# Altium PCB 板框.PcbDoc
Units mil, origin at the board's own origin, x right, y up, seen from the top; angles counter-clockwise.
Board outline 7795.81 x 3150.14 mil, 2 copper layers (Top Layer, Bottom Layer); 1 components, 0 nets, 2 pads, 0 vias.
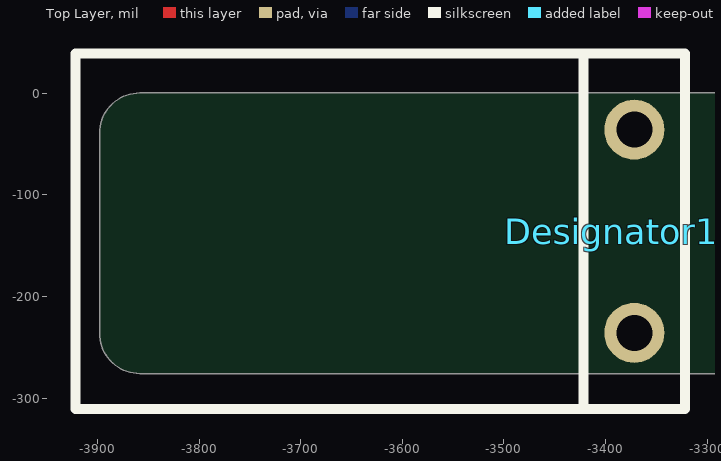
[diagram p0: Top Layer view]
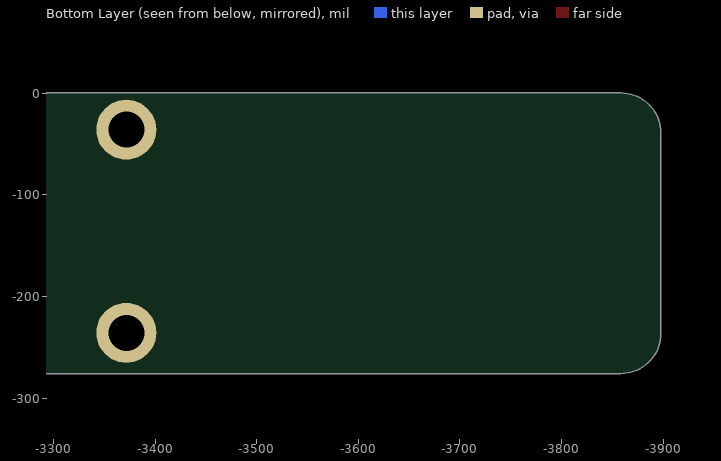
[diagram p1: Bottom Layer view, seen from below]

## Layer stack, top to bottom
Top Solder: solder mask 0.4, Solder Resist, Dk 3.5
Top Layer: signal copper 1.4
Dielectric 1: dielectric 12.6, FR-4, Dk 4.8
Bottom Layer: signal copper 1.4
Bottom Solder: solder mask 0.4, Solder Resist, Dk 3.5

## Board outline
-1716.8,-3086.88 -1834.65,-3086.88 cw(c-1834.65,-3086.61) -1834.91,-3086.61 -1834.91,-3007.87 cw(c-1795.28,-3007.87) -1795.28,-2968.24 -1629.92,-2968.24 cw(c-1629.92,-2968.5) -1629.91,-2968.24 ccw(c-1629.92,-2929.13) -1590.82,-2929.13 -1590.82,-314.96 ccw(c-1629.92,-314.96) -1629.91,-275.86 ccw(c-1629.92,-314.96) -1629.92,-275.86 -3858.27,-275.86 cw(c-3858.27,-236.22) -3897.9,-236.22 cw(c-3897.64,-236.22) -3897.9,-236.21 -3897.9,-39.37 cw(c-3858.27,-39.37) -3858.27,0.26 3858.27,0.26 cw(c3858.27,-39.37) 3897.9,-39.37 cw(c3897.64,-39.37) 3897.9,-39.38 3897.9,-236.22 ccw(c3897.64,-236.22) 3897.9,-236.21 3897.9,-236.22 cw(c3858.27,-236.22) 3858.27,-275.86 1629.92,-275.86 cw(c1629.92,-275.59) 1629.91,-275.86 cw(c1629.92,-314.96) 1629.92,-275.86 1629.91,-275.86 ccw(c1629.92,-314.96) 1590.82,-314.96 1590.82,-2929.13 ccw(c1629.92,-2929.13) 1629.91,-2968.24 cw(c1629.92,-2968.5) 1629.92,-2968.24 1795.28,-2968.24 cw(c1795.28,-3007.87) 1834.91,-3007.87 1834.91,-3086.61 cw(c1834.65,-3086.61) 1834.65,-3086.88 1716.8,-3086.88 1716.8,-3149.61 cw(c1716.54,-3149.61) 1716.54,-3149.87 1354.33,-3149.87 cw(c1354.33,-3149.61) 1354.07,-3149.61 1354.07,-314.96 ccw(c1314.96,-314.96) 1314.97,-275.86 cw(c1314.96,-275.59) 1314.96,-275.86 -1314.96,-275.86 cw(c-1314.96,-275.59) -1314.97,-275.86 cw(c-1314.96,-314.96) -1314.96,-275.86 -1314.97,-275.86 ccw(c-1314.96,-314.96) -1354.07,-314.96 -1354.07,-3149.61 cw(c-1354.33,-3149.61) -1354.33,-3149.87 -1716.54,-3149.87 cw(c-1716.54,-3149.61) -1716.8,-3149.61

## Design rules (kind name [scope] priority, off if disabled: settings)
Clearance [All] p1: gap=10 ignorepadtopadclearanceinfootprint=FALSE except(0: Arc-Hole Track-Hole SMDPad-Hole THPad-Hole Via-Hole Fill-Hole Poly-Hole Region-Hole Text-Hole)
PolygonConnect [All] p1: connectstyle=Relief reliefconductorwidth=10 reliefentries=4 polygonreliefangle="90 Angle" airgapwidth=10
RoutingVias [All] p1: holewidth=28 width=50 viastyle="Through Hole" minholewidth=28 minwidth=50 maxholewidth=28 maxwidth=50
SolderMaskExpansion [All] p1: expansion=4 istentingtop=FALSE
Width [All] p1: maxlimit=10 minlimit=10 preferedwidth=10
30 further rules are at their usual default settings.

## Components (designator, comment, footprint, x,y, rotation, side; value= is the part's Value field where it differs from the comment)
Designator165 "Comment" LD8x10 -3371.61,-135.86 r90 top

## Footprints (in the part's own frame and the unit in brackets; to place one, negate y for a bottom-side part, rotate by r counter-clockwise, add the part's x,y. Pads: shape width x height; smd on the part's side, far side on the other; paste and mask are expansions set on the pad)
LD8x10 [mm] "直插8x10mm电感"
  round 1.5 hole 0.9: 1(-2.54,0) 2(2.54,0)
  silkscreen extent -4.45,-1.27 4.44,13.97, body extent -4,-0.4 4,13.25, height 8

## Nets (pads, with @x,y where several pads share a name; then routed paths per layer and width w, separated by ;. In a path a pad name is that pad's centre, name@x,y a point inside that pad or via, vN(x,y) a via of type N, cw(c..) or ccw(c..) an arc to the next point about the centre after c; other vN are vias at no path point)
pads on no net: Designator165.1 Designator165.2

## Silkscreen, mask and mechanical layers (free items; w line width, h text height)
Mechanical 1:
  lines w0.5: -3897.64,-236.22 ccw(c-3858.27,-236.22) -3858.27,-275.59 ; -3897.64,-236.22 ccw(c-3858.27,-236.22) -3858.27,-275.59 ; -3897.64,-236.22 -3897.64,-39.37 ; -3897.64,-236.22 -3897.64,-39.37 ; -3897.64,-39.37 cw(c-3858.27,-39.37) -3858.27,0 ; -3897.64,-39.37 cw(c-3858.27,-39.37) -3858.27,0 ; -3858.27,-275.59 -1629.92,-275.59 ; -3858.27,-275.59 -1629.92,-275.59 ; -3858.27,0 3858.27,0 ; -3858.27,0 3858.27,0 ; -3818.9,-196.85 -3503.94,-196.85 ; -3818.9,-196.85 -3818.9,-78.74 ; -3818.9,-196.85 -3503.94,-196.85 ; -3818.9,-196.85 -3818.9,-78.74 ; -3818.9,-78.74 -3503.94,-78.74 ; -3818.9,-78.74 -3503.94,-78.74 ; -3503.94,-196.85 -3503.94,-78.74 ; -3503.94,-196.85 -3503.94,-78.74 ; -3503.94,-78.74 -3503.94,-137.8 -3503.94,-78.74 ; -1988.19,-196.85 -1673.23,-196.85 ; -1988.19,-196.85 -1988.19,-78.74 ; -1988.19,-196.85 -1673.23,-196.85 ; -1988.19,-196.85 -1988.19,-78.74 ; -1988.19,-78.74 -1673.23,-78.74 ; -1988.19,-78.74 -1673.23,-78.74 ; -1834.65,-3086.61 -1834.65,-3007.87 ; -1834.65,-3086.61 -1716.54,-3086.61 ; -1834.65,-3086.61 -1834.65,-3007.87 ; -1834.65,-3086.61 -1716.54,-3086.61 ; -1834.65,-3007.87 cw(c-1795.28,-3007.87) -1795.28,-2968.5 ; -1834.65,-3007.87 cw(c-1795.28,-3007.87) -1795.28,-2968.5 ; -1795.28,-2968.5 -1629.92,-2968.5 ; -1795.28,-2968.5 -1629.92,-2968.5 ; -1716.54,-3149.61 -1716.54,-3086.61 ; -1716.54,-3149.61 -1354.33,-3149.61 ; -1716.54,-3149.61 -1716.54,-3086.61 ; -1716.54,-3149.61 -1354.33,-3149.61 ; -1673.23,-196.85 -1673.23,-137.8 ; -1673.23,-196.85 -1673.23,-137.8 ; -1673.23,-137.8 -1673.23,-78.74 ; -1673.23,-137.8 -1673.23,-78.74 ; -1629.92,-2968.5 ccw(c-1629.92,-2929.13) -1590.55,-2929.13 ; -1629.92,-2968.5 ccw(c-1629.92,-2929.13) -1590.55,-2929.13 ; -1629.92,-275.59 cw(c-1629.92,-314.96) -1590.55,-314.96 ; -1629.92,-275.59 cw(c-1629.92,-314.96) -1590.55,-314.96 ; -1590.55,-2929.13 -1590.55,-314.96 ; -1590.55,-2929.13 -1590.55,-314.96 ; -1354.33,-3149.61 -1354.33,-314.96 ; -1354.33,-3149.61 -1354.33,-314.96 ; -1354.33,-314.96 cw(c-1314.96,-314.96) -1314.96,-275.59 ; -1354.33,-314.96 cw(c-1314.96,-314.96) -1314.96,-275.59 ; -1314.96,-275.59 1314.96,-275.59 ; -1314.96,-275.59 1314.96,-275.59 ; -157.48,-196.85 157.48,-196.85 ; -157.48,-196.85 -157.48,-78.74 ; -157.48,-196.85 157.48,-196.85 ; -157.48,-196.85 -157.48,-78.74 ; -157.48,-78.74 157.48,-78.74 ; -157.48,-78.74 157.48,-78.74 ; 157.48,-196.85 157.48,-78.74 ; 157.48,-196.85 157.48,-78.74 ; 157.48,-78.74 157.48,-137.8 157.48,-78.74 ; 1314.96,-275.59 cw(c1314.96,-314.96) 1354.33,-314.96 ; 1314.96,-275.59 cw(c1314.96,-314.96) 1354.33,-314.96 ; 1354.33,-3149.61 1716.54,-3149.61 ; 1354.33,-3149.61 1354.33,-314.96 ; 1354.33,-3149.61 1716.54,-3149.61 ; 1354.33,-3149.61 1354.33,-314.96 ; 1590.55,-2929.13 ccw(c1629.92,-2929.13) 1629.92,-2968.5 ; 1590.55,-2929.13 ccw(c1629.92,-2929.13) 1629.92,-2968.5 ; 1590.55,-2929.13 1590.55,-314.96 ; 1590.55,-2929.13 1590.55,-314.96 ; 1590.55,-314.96 cw(c1629.92,-314.96) 1629.92,-275.59 ; 1590.55,-314.96 cw(c1629.92,-314.96) 1629.92,-275.59 ; 1629.92,-2968.5 1795.28,-2968.5 ; 1629.92,-2968.5 1795.28,-2968.5 ; 1629.92,-275.59 3858.27,-275.59 ; 1629.92,-275.59 3858.27,-275.59 ; 1673.23,-196.85 1988.19,-196.85 ; 1673.23,-196.85 1673.23,-78.74 ; 1673.23,-196.85 1988.19,-196.85 ; 1673.23,-196.85 1673.23,-78.74 ; 1673.23,-78.74 1988.19,-78.74 ; 1673.23,-78.74 1988.19,-78.74 ; 1716.54,-3149.61 1716.54,-3086.61 ; 1716.54,-3149.61 1716.54,-3086.61 ; 1716.54,-3086.61 1834.65,-3086.61 ; 1716.54,-3086.61 1834.65,-3086.61 ; 1795.28,-2968.5 cw(c1795.28,-3007.87) 1834.65,-3007.87 ; 1795.28,-2968.5 cw(c1795.28,-3007.87) 1834.65,-3007.87 ; 1834.65,-3086.61 1834.65,-3007.87 ; 1834.65,-3086.61 1834.65,-3007.87 ; 1988.19,-196.85 1988.19,-137.8 ; 1988.19,-196.85 1988.19,-137.8 ; 1988.19,-137.8 1988.19,-78.74 ; 1988.19,-137.8 1988.19,-78.74 ; 3503.94,-196.85 3818.9,-196.85 ; 3503.94,-196.85 3503.94,-78.74 ; 3503.94,-196.85 3818.9,-196.85 ; 3503.94,-196.85 3503.94,-78.74 ; 3503.94,-78.74 3818.9,-78.74 ; 3503.94,-78.74 3818.9,-78.74 ; 3818.9,-196.85 3818.9,-88.58 3818.9,-196.85 ; 3818.9,-78.74 3818.9,-137.8 3818.9,-78.74 ; 3858.27,-275.59 ccw(c3858.27,-236.22) 3897.64,-236.22 ; 3858.27,-275.59 ccw(c3858.27,-236.22) 3897.64,-236.22 ; 3858.27,0 cw(c3858.27,-39.37) 3897.64,-39.37 ; 3858.27,0 cw(c3858.27,-39.37) 3897.64,-39.37 ; 3897.64,-236.22 3897.64,-39.37 ; 3897.64,-236.22 3897.64,-39.37